# Altium PCB D20 - Copy.PcbDoc
Units mm, origin at the board's own origin, x right, y up, seen from the top; angles counter-clockwise.
Board outline 152.4 x 101.6 mm, 2 copper layers (Top Layer, Bottom Layer); 23 components, 34 nets, 103 pads, 0 vias.
Unrouted connection lines stored in the file: 7.
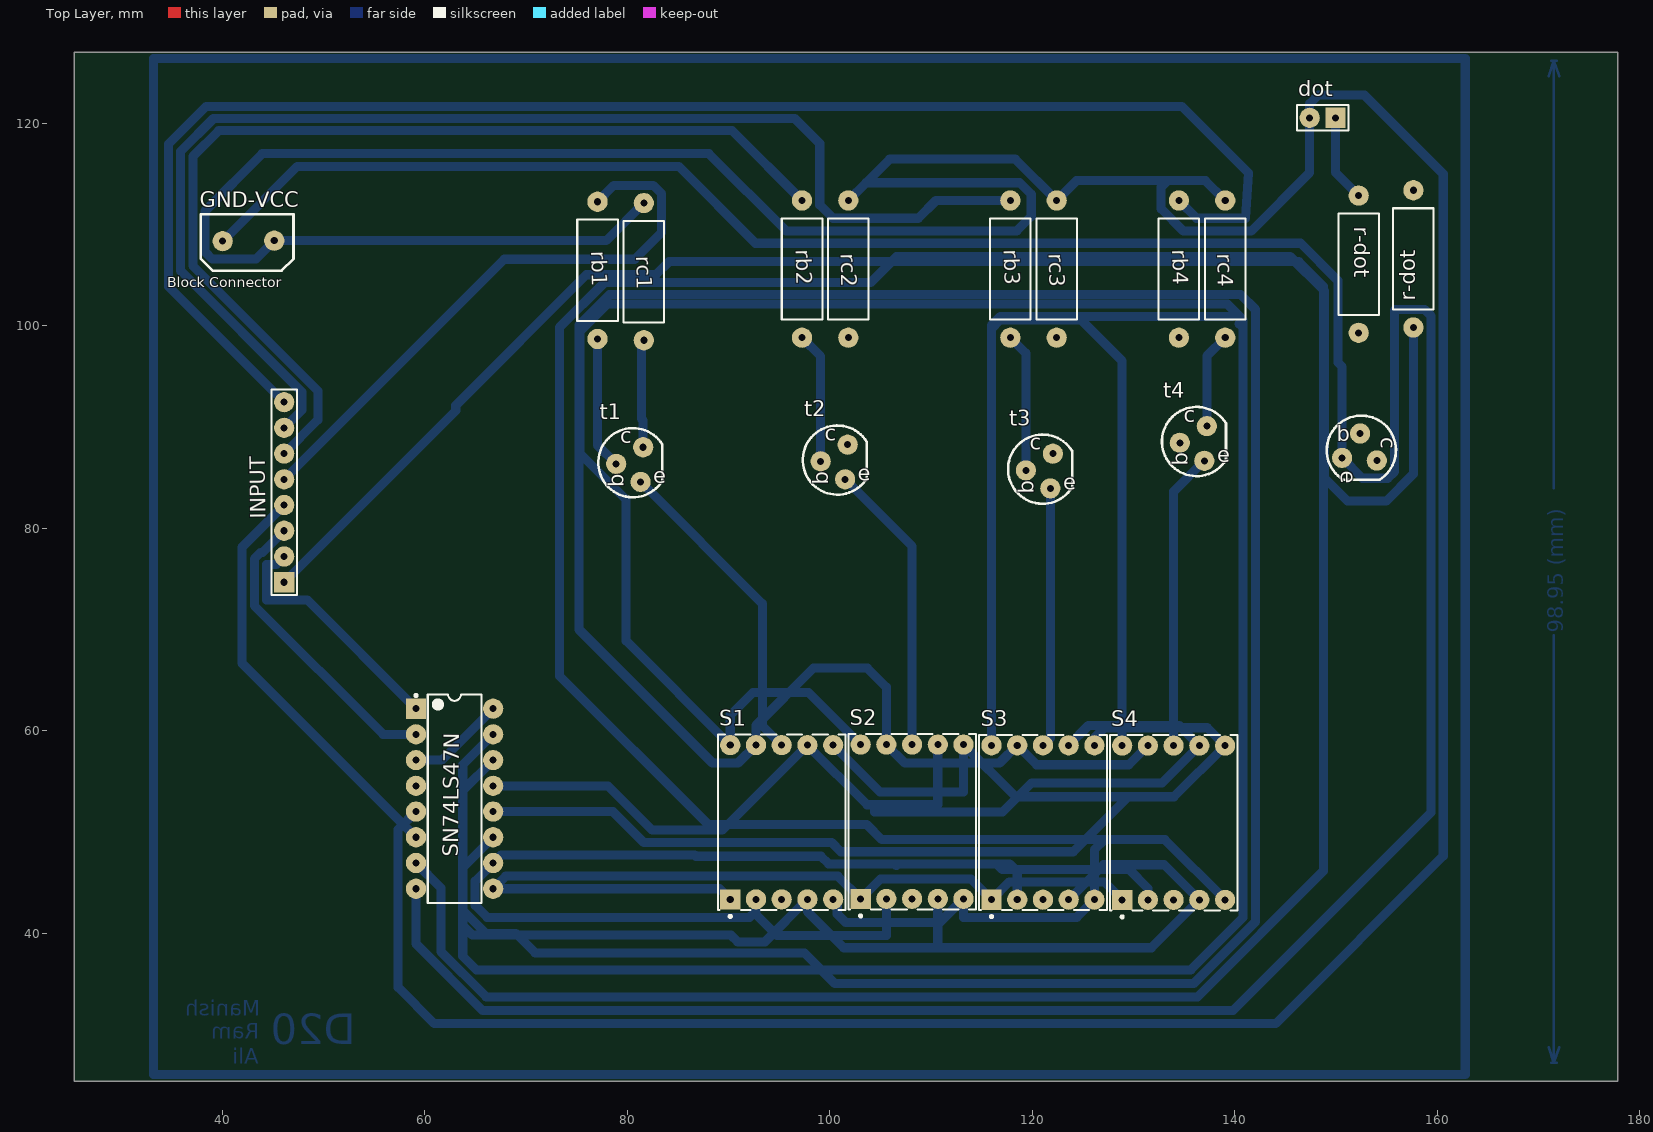
[diagram p0: Top Layer view]
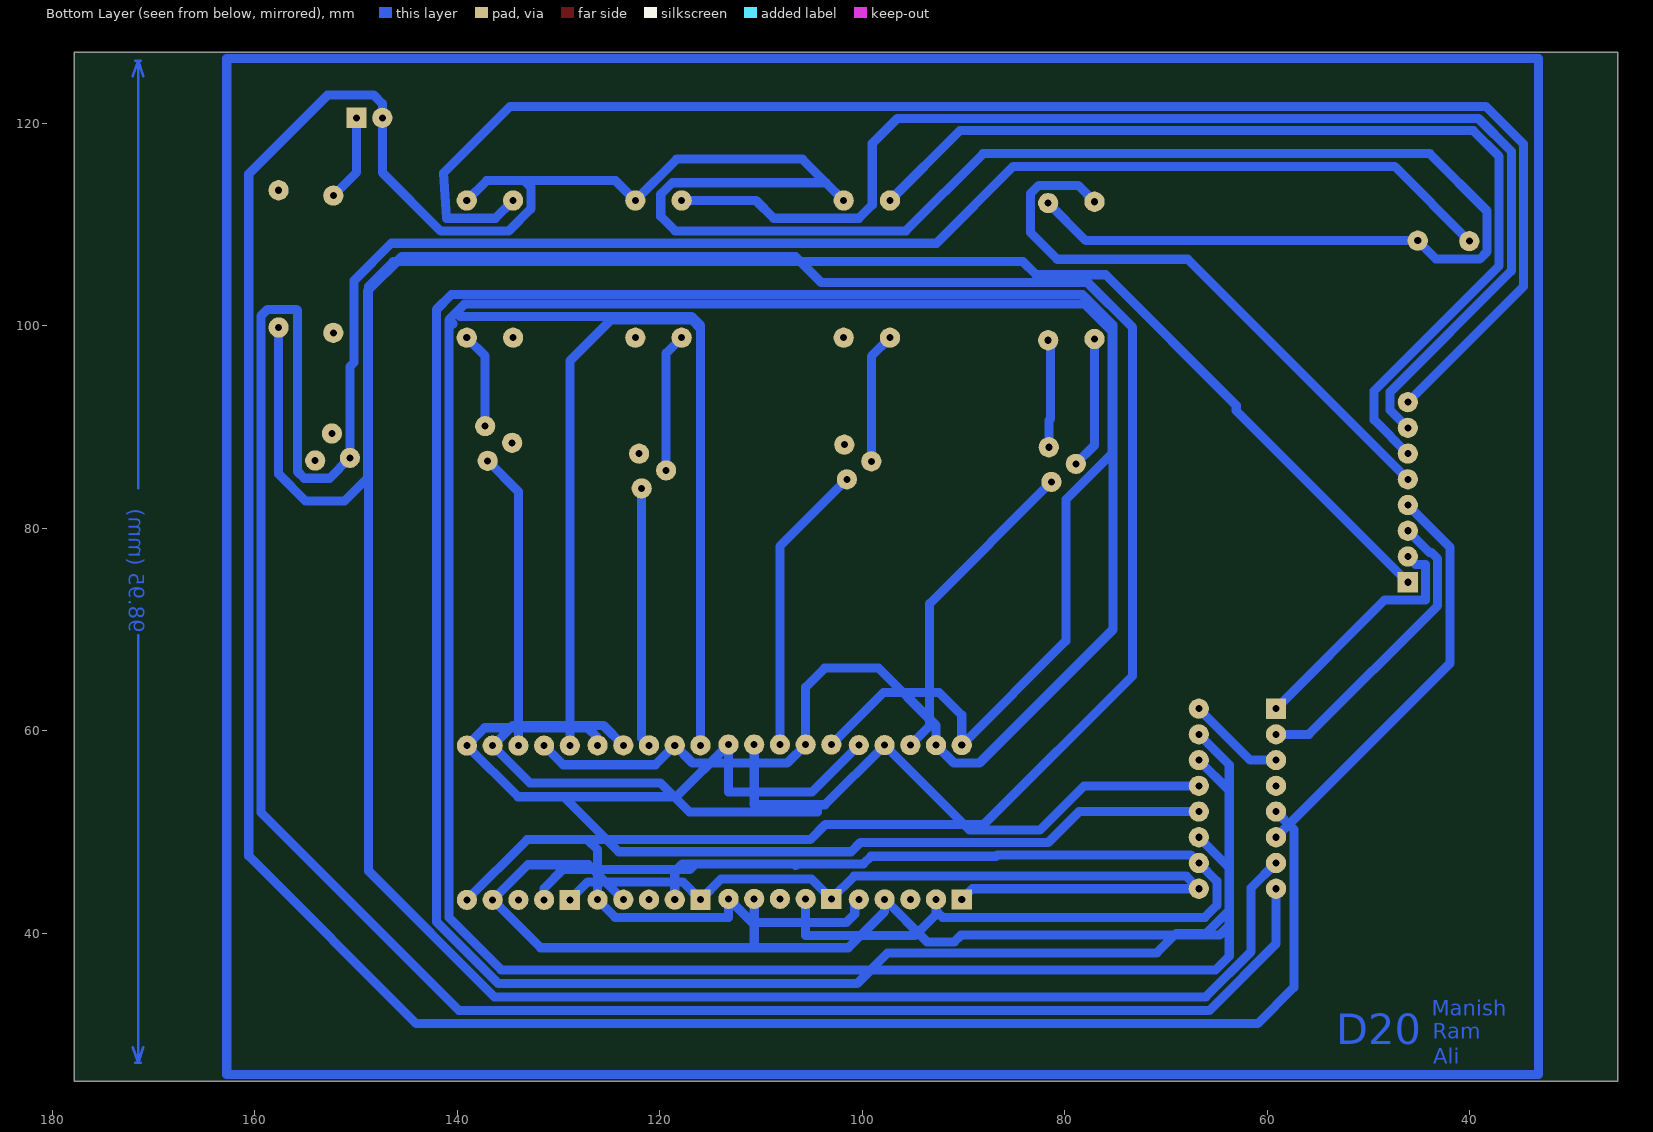
[diagram p1: Bottom Layer view, seen from below]

## Layer stack, top to bottom
Top Layer: signal copper 0.0356
Dielectric: dielectric 0.32, FR-4, Dk 4.8
Bottom Layer: signal copper 0.0356

## Board outline
25.4,25.4 177.8,25.4 177.8,127 25.4,127

## Design rules (kind name [scope] priority, off if disabled: settings)
Clearance [All] p1: gap=0.3
PolygonConnect [All] p1: connectstyle=Relief reliefconductorwidth=0.254 reliefentries=4 polygonreliefangle="90 Angle"
RoutingVias [All] p1: holewidth=0.711 width=1.27 viastyle="Through Hole" minholewidth=0.711 minwidth=1.27 maxholewidth=0.711 maxwidth=1.27
SilkscreenOverComponentPads [All] p1: minsilkscreentomaskgap=0.254
SolderMaskExpansion [All] p1: expansion=0.102
Width [All] p1: maxlimit=1 minlimit=0.8 preferedwidth=0.9 minimp=50.000000 maximp=50.000000 favimp=50.000000
27 further rules are at their usual default settings.

## Components (designator, comment, footprint, x,y, rotation, side; value= is the part's Value field where it differs from the comment)
dot "Comment" HDR1X2 149.925,120.525 r180 top
GND-VCC "Comment" "PCB Block Connector" 42.6,108.375 r0 top
INPUT "Comment" HDR1X8 46.125,74.675 r90 top
r-dot "Comment" "TO-92 Packaging" 152.3,88.025 r270 top
r-dot "Comment" RES13.55-10X4 157.625,106.6 r270 top
rb1 "Comment" RES13.55-10X4 77.064,105.467 r90 top
rb2 "Comment" RES13.55-10X4 97.257,105.594 r90 top
rb3 "Comment" RES13.55-10X4 117.831,105.594 r90 top
rb4 "Comment" RES13.55-10X4 134.472,105.594 r90 top
rc1 "Comment" RES13.55-10X4 81.636,105.34 r90 top
rc2 "Comment" RES13.55-10X4 101.829,105.594 r90 top
rc3 "Comment" RES13.55-10X4 122.403,105.594 r90 top
rc4 "Comment" RES13.55-10X4 139.044,105.594 r90 top
S1 "Comment" LEDDIP-10/14.27RHD 95.25,50.975 r0 top
S2 "Comment" LEDDIP-10/14.27RHD 108.125,51.025 r0 top
S3 "Comment" LEDDIP-10/14.27RHD 121.05,50.95 r0 top
S4 "Comment" LEDDIP-10/14.27RHD 133.95,50.925 r0 top
SN74LS47N "Comment" DIP-16 62.95,53.3 r0 top
t1 "Comment" "TO-92 Packaging" 80.239,86.29 r0 top
t2 "Comment" "TO-92 Packaging" 100.432,86.544 r0 top
t3 "Comment" "TO-92 Packaging" 120.7,85.65 r0 top
t4 "Comment" "TO-92 Packaging" 135.9,88.375 r0 top
? "Comment" RES13.55-10X4 152.225,106.075 r270 top

## Footprints (in the part's own frame and the unit in brackets; to place one, negate y for a bottom-side part, rotate by r counter-clockwise, add the part's x,y. Pads: shape width x height; smd on the part's side, far side on the other; paste and mask are expansions set on the pad)
DIP-16 [mm] "DIP, 16-Pin, Row Spacing 7.62 mm, Pitch 2.54 mm"
  rect 2x2 hole 0.7: 1(-3.81,8.89)
  round 2 hole 0.7: 2(-3.81,6.35) 3(-3.81,3.81) 4(-3.81,1.27) 5(-3.81,-1.27) 6(-3.81,-3.81) 7(-3.81,-6.35) 8(-3.81,-8.89) 9(3.81,-8.89) 10(3.81,-6.35) 11(3.81,-3.81) 12(3.81,-1.27) 13(3.81,1.27) 14(3.81,3.81) 15(3.81,6.35) 16(3.81,8.89)
  silkscreen extent -3.93,-10.3 2.65,10.31, body extent -3.6,-10.28 3.6,10.28, height 5.08
HDR1X2 [mm]
  rect 2x2 hole 0.7: 1(0,0)
  round 2 hole 0.7: 2(2.54,0)
  silkscreen extent -1.27,-1.27 3.81,1.27
HDR1X8 [mm]
  rect 2x2 hole 0.7: 1(0,0)
  round 2 hole 0.7: 2(2.54,0) 3(5.08,0) 4(7.62,0) 5(10.16,0) 6(12.7,0) 7(15.24,0) 8(17.78,0)
  silkscreen extent -1.27,-1.27 19.05,1.27
LEDDIP-10/14.27RHD [mm] "LED, 7-Segment Display, 14.27 mm, RHD; 10 Leads; Row Space 15.24 mm; Pitch 2.54 mm"
  rect 2x2 hole 0.7: 1(-5.08,-7.62)
  round 2 hole 0.7: 2(-2.54,-7.62) 3(0,-7.62) 4(2.54,-7.62) 5(5.08,-7.62) 6(5.08,7.62) 7(2.54,7.62) 8(0,7.62) 9(-2.54,7.62) 10(-5.08,7.62)
  silkscreen extent -6.3,-9.42 6.3,8.65, body extent -6.3,-8.65 6.3,8.65, height 8.3
"PCB Block Connector" [mm]
  round 2 hole 0.7: 1(-2.547,-0.023) 2(2.547,0.023)
  silkscreen extent -4.7,-2.94 4.44,2.64
RES13.55-10X4 [mm] "Resistor, Axial; Body 10 x 4 mm (LxDia. max), Lead Dia. 0.65 mm (max)"
  round 2 hole 0.7: 1(-6.775,0) 2(6.775,0)
  silkscreen extent -5,-2 5,2
"TO-92 Packaging" [mm] "for 2N3904"
  round 2 hole 0.7: T(-1.333,0.063) T(1.08,-1.715) T(1.334,1.714)
  silkscreen extent -3.1,-3.23 3.22,3.61

## Nets (pads, with @x,y where several pads share a name; then routed paths per layer and width w, separated by ;. In a path a pad name is that pad's centre, name@x,y a point inside that pad or via, vN(x,y) a via of type N, cw(c..) or ccw(c..) an arc to the next point about the centre after c; other vN are vias at no path point)
a: S1.7 S2.7 S3.7 S4.7 SN74LS47N.13 | length 107.6
  Bottom Layer w0.9: SN74LS47N.13 78.094,54.57 82.474,50.19 89.385,50.19 S1.7 103.68,52.705 104.417,52.705 ; S2.7 110.665,52.705 104.417,52.705 ; S3.7 125.548,60.528 134.507,60.528 S4.7 132.809,54.864 119.939,54.864 117.043,51.968 104.417,51.968 104.417,52.705
A0: INPUT.1 SN74LS47N.7 | length 278.7
  Bottom Layer w0.9: INPUT.1 63.068,91.618 63.068,92.126 75.971,105.029 82.829,105.029 84.125,106.324 146.304,106.324 148.742,103.886 148.742,46.157 136.317,33.731 66.077,33.731 61.595,38.213 61.595,44.495 SN74LS47N.7
A1: INPUT.2 SN74LS47N.1 | length 24.8
  Bottom Layer w0.9: INPUT.2 45.339,76.429 44.375,76.429 44.375,72.925 48.405,72.925 SN74LS47N.1
A2: INPUT.3 SN74LS47N.2 | length 29.9
  Bottom Layer w0.9: INPUT.3 43.995,77.625 43.815,77.625 43.175,76.985 43.175,72.365 55.89,59.65 SN74LS47N.2
A3: INPUT.4 SN74LS47N.6 | length 41.6
  Bottom Layer w0.9: INPUT.4 41.961,78.131 41.961,66.669 SN74LS47N.6
b: S1.6 S2.6 S3.6 S4.6 SN74LS47N.12 | length 130.9
  Bottom Layer w0.9: SN74LS47N.12 78.577,52.03 81.636,48.971 100.175,48.971 101.089,48.057 124.037,48.057 129.473,53.492 ; S1.6 104.975,53.95 113.205,53.95 S2.6 118.358,53.492 129.473,53.492 ; S3.6 126.13,59.303 127.127,60.3 137.275,60.3 S4.6 133.977,53.492 129.473,53.492
b1: rb1.1 t1.T@78.906,86.353 | length 13.1
  Bottom Layer w0.9: rb1.1 77.064,88.195 t1.T@78.906,86.353
b2: rb2.1 t2.T@99.099,86.607 | length 13
  Bottom Layer w0.9: rb2.1 99.099,96.978 t2.T@99.099,86.607
b3: rb3.1 t3.T@119.366,85.714 | length 13.7
  Bottom Layer w0.9: rb3.1 119.366,97.284 t3.T@119.366,85.714
b4: rb4.1 t4.T@134.567,88.438
b5: ?.1 ?.2 dot.1 r-dot.T@152.363,89.358 | length 8.6
  Bottom Layer w0.9: dot.1 149.925,115.15 ?.1
c: S1.4 S2.4 S3.4 S4.4 SN74LS47N.11 | length 110.3
  Bottom Layer w0.9: SN74LS47N.11 63.754,46.484 63.754,40.792 64.719,39.827 90.246,39.827 90.907,39.167 93.602,39.167 S1.4 97.79,42.164 101.378,38.576 110.665,38.576 ; S2.4 110.665,38.576 ; S3.4 127.037,46.777 133.018,46.777 S4.4 131.761,38.576 110.665,38.576
c1: rc1.1 t1.T@81.573,88.004 | length 10.7
  Bottom Layer w0.9: t1.T@81.573,88.004 81.573,90.657 81.41,90.82 81.41,98.339 rc1.1
c2: rc2.1 t2.T@101.766,88.258
c3: rc3.1 t3.T@122.033,87.365
c4: rc4.1 t4.T@137.234,90.089 | length 9.5
  Bottom Layer w0.9: t4.T@137.234,90.089 137.234,97.008 rc4.1
c5: r-dot.1 r-dot.T@154.014,86.691
CA1: S1.8 t1.T@81.319,84.575 | length 31.8
  Bottom Layer w0.9: t1.T@81.319,84.575 93.345,72.549 93.345,60.5 S1.8
CA2: S2.8 t2.T@101.512,84.829 | length 28.9
  Bottom Layer w0.9: t2.T@101.512,84.829 108.125,78.216 S2.8
CA3: S3.8 t3.T@121.779,83.936 | length 25.7
  Bottom Layer w0.9: S3.8 121.779,59.3 t3.T@121.779,83.936
CA4: S4.8 t4.T@136.98,86.66 | length 29.4
  Bottom Layer w0.9: S4.8 133.95,83.631 t4.T@136.98,86.66
d: S1.2 S2.2 S3.2 S4.2 SN74LS47N.10 | length 135.1
  Bottom Layer w0.9: S1.2 92.71,42.215 92.532,42.037 ; S2.2 105.585,39.776 94.793,39.776 92.532,42.037 ; S3.2 118.51,46.101 118.307,46.304 ; S4.2 131.41,44.45 129.556,46.304 118.307,46.304 ; 92.532,42.037 92.075,41.58 66.169,41.58 64.971,42.777 64.971,45.161 SN74LS47N.10 67.562,47.752 86.668,47.752 86.808,47.613 99.124,47.613 99.88,46.857 106.417,46.857 ; 106.417,46.857 106.563,46.711 106.566,46.714 ; 106.417,46.857 106.423,46.857 106.566,46.714 ; 106.566,46.714 106.709,46.857 116.492,46.857 116.498,46.851 ; 106.566,46.714 106.569,46.711 106.709,46.851 116.498,46.851 ; 116.498,46.851 117.761,46.851 118.307,46.304 ; 116.498,46.851 117.044,46.304 118.307,46.304
D1: INPUT.5 rb1.2 | length 58.5
  Bottom Layer w0.9: INPUT.5 67.859,106.569 80.737,106.569 83.388,109.22 83.388,113.03 82.553,113.865 78.687,113.865 rb1.2
D2: INPUT.6 rb2.2 | length 99.9
  Bottom Layer w0.9: INPUT.6 49.454,90.704 49.454,93.574 37.103,105.925 37.103,116.707 39.661,119.265 90.361,119.265 rb2.2
D3: INPUT.7 rb3.2 | length 124.6
  Bottom Layer w0.9: INPUT.7 47.875,91.665 47.875,93.456 35.903,105.428 35.903,117.221 39.147,120.465 96.534,120.465 99.009,117.99 99.009,111.938 100.33,110.617 108.732,110.617 110.484,112.369 rb3.2
D4: INPUT.8 rb4.2 | length 152.9
  Bottom Layer w0.9: INPUT.8 34.696,103.884 34.696,117.932 38.429,121.665 134.748,121.665 141.326,115.087 141.046,110.617 136.224,110.617 rb4.2
dot: r-dot.2 S1.5 S2.5 S3.5 S4.5 | length 270.1
  Bottom Layer w0.9: S1.5 100.736,42.949 100.736,41.91 101.575,41.072 110.872,41.072 S2.5 113.205,41.58 124.38,41.58 S3.5 126.13,48.254 127.127,49.251 ; S4.5 133.084,49.251 127.127,49.251 ; r-dot.2 157.625,85.362 154.94,82.677 151.13,82.677 148.819,84.988 148.819,103.454 145.44,106.832 106.604,106.832 104.038,104.267 77.749,104.267 73.304,99.822 73.304,65.43 87.986,50.749 103.639,50.749 105.138,49.251 127.127,49.251
dot-c: 
e: S1.1 S2.1 S3.1 S4.1 SN74LS47N.9 | length 90.5
  Bottom Layer w0.9: S1.1 89.115,44.41 SN74LS47N.9 68.007,45.657 100.793,45.657 S2.1 104.992,45.352 113.948,45.352 S3.1 117.725,45.085 127.09,45.085 S4.1
e5: 
f: S1.9 S2.9 S3.9 S4.9 SN74LS47N.15 | length 337.7
  Bottom Layer w0.9: SN74LS47N.15 63.754,56.644 63.754,42.298 66.047,40.005 68.986,40.005 70.917,38.075 97.485,38.075 100.508,35.052 135.941,35.052 142.037,41.148 142.037,101.6 140.57,103.067 78.246,103.067 75.235,100.055 75.235,70.002 88.417,56.82 90.935,56.82 S1.9 92.71,60.528 98.374,66.192 103.708,66.192 105.585,64.316 S2.9 107.41,56.82 116.76,56.82 S3.9 120.429,56.651 129.516,56.651 S4.9
g: S1.10 S2.10 S3.10 S4.10 SN74LS47N.14 | length 412.7
  Bottom Layer w0.9: SN74LS47N.14 63.754,54.104 63.754,37.751 65.107,36.398 135.636,36.398 140.818,41.58 140.818,99.797 ; S2.10 97.911,63.779 92.405,63.779 90.17,61.544 S1.10 79.883,68.882 79.883,82.829 75.314,87.398 75.314,99.417 78.03,102.133 139.268,102.133 140.094,101.308 ; S3.10 115.97,99.714 ; S4.10 128.87,96.52 124.806,100.584 116.84,100.584 115.97,99.714 ; 115.97,99.714 115.97,100.044 116.84,100.914 139.7,100.914 140.094,101.308 ; 140.094,101.308 140.818,100.584 ; 140.818,99.797 140.424,100.19 140.818,100.584 ; 140.818,99.797 140.818,100.584
GND: GND-VCC.1 r-dot.T@150.585,86.945 SN74LS47N.8 | length 327.2
  Bottom Layer w0.9: GND-VCC.1 47.429,115.728 85.084,115.728 92.665,108.147 146.488,108.147 150.165,104.47 150.165,96.374 150.585,95.954 150.585,86.945 152.593,84.938 155.094,84.938 155.764,85.608 155.764,101.51 155.854,101.6 158.74,101.6 159.375,100.965 159.375,51.948 139.804,32.377 65.735,32.377 59.14,38.971 SN74LS47N.8
VCC: dot.2 GND-VCC.2 rc1.2 rc2.2 rc3.2 rc4.2 SN74LS47N.3 SN74LS47N.5 SN74LS47N.16 | length 453.8
  Bottom Layer w0.9: SN74LS47N.5 57.379,50.269 57.379,34.671 60.96,31.09 144.018,31.09 160.579,47.65 160.579,114.986 152.781,122.784 148.249,122.784 147.385,121.92 dot.2 147.385,115.127 141.605,109.347 134.925,109.347 132.715,111.557 132.715,113.69 133.35,114.325 137.088,114.325 ; SN74LS47N.3 61.68,57.11 SN74LS47N.16 ; rc1.2 77.919,108.398 GND-VCC.2 43.328,106.578 39.04,106.578 38.303,107.315 38.303,111.331 43.964,116.992 88.063,116.992 95.686,109.369 118.463,109.369 119.887,110.794 119.887,112.98 118.745,114.122 103.582,114.122 ; rc2.2 103.582,114.122 ; rc4.2 137.088,114.325 ; 103.582,114.122 105.919,116.459 118.313,116.459 rc3.2 124.36,114.326 137.087,114.326
pads on no net: S1.3 S2.3 S3.3 S4.3 SN74LS47N.4
copper on no net: | length 551.3
  Bottom Layer w0.254: 170.992,28.749 171.5,27.225 ; 170.992,124.651 171.5,126.175 ; 171.246,27.225 171.754,27.225 ; 171.246,126.175 171.754,126.175 ; 171.5,69.438 171.5,27.225 ; 171.5,83.962 171.5,126.175 ; 172.008,28.749 171.5,27.225 ; 172.008,124.651 171.5,126.175
  Bottom Layer w0.9: 33.225,126.375 33.225,26.075 162.75,26.075 162.75,126.375 33.425,126.375

## Other copper
Bottom Layer:
  text "98.95 (mm)" at 172.414,69.692 h1.52 r90
  text "Manish" at 43.775,31.85 h1.5
  text "Ram" at 43.675,29.575 h1.5
  text "D20" at 53.175,29.05 h3
  text "Ali" at 43.6,27.125 h1.5

## Text inside footprints (layer, text, board x,y; h text height)
GND-VCC: Top Overlay "Block Connector" at 34.599,103.803 h1.02
r-dot: Top Overlay "c" at 154.396,88.978 h1.5 r270; Top Overlay "e" at 150.459,85.676 h1.5 r270; Top Overlay "b" at 150.078,88.597 h1.52
t1: Top Overlay "c" at 79.287,88.386 h1.5; Top Overlay "e" at 82.589,84.449 h1.5; Top Overlay "b" at 79.668,84.068 h1.52 r90
t2: Top Overlay "c" at 99.48,88.64 h1.5; Top Overlay "e" at 102.782,84.703 h1.5; Top Overlay "b" at 99.861,84.322 h1.52 r90
t3: Top Overlay "c" at 119.747,87.745 h1.5; Top Overlay "e" at 123.049,83.808 h1.5; Top Overlay "b" at 120.128,83.427 h1.52 r90
t4: Top Overlay "c" at 134.947,90.47 h1.5; Top Overlay "e" at 138.249,86.533 h1.5; Top Overlay "b" at 135.328,86.152 h1.52 r90